# EAGLE board modemIO_v1 (EAGLE 6.2)

Size 79.05 x 69.2 mm. Coordinates in mm from the lower left corner, seen from the top.
Outline: 0,0 79.05,0 79.05,69.2 0,69.2 0,0
Copper layers (1*16): Top 0.035mm / dielectric 1.5mm / Bottom 0.035mm
Design rules: minimum track width 10mil, minimum drill 24mil, track to track 8mil, track to pad 8mil, pad to pad 8mil, via to via 8mil, smd to smd 8mil, copper to edge 40mil, drill to drill 8mil, minimum pad ring 10mil, minimum via ring 8mil, stop-mask expansion 4mil, vias tented up to drill 0mil, thermal gap 10mil
Holes 3.3 mm at 2.54,2.54 76.2,6.99 69.85,63.5 15.24,58.42

## Footprints (pad centres in the part's own frame; a part is rotated, then mirrored left to right if it is on the bottom)
C0805 = smd 1.3 x 1.5: 1 -0.85,0; 2 0.85,0
AVX-C = smd 1.524 x 2.54: + -2.794,0; - 2.794,0
DCJACK_2MM_PTH = drill 2.8: GND 0,7.35; GNDBREAK 4.8,10.75 | drill 3.2: PWR 0,13.6
1X10 = drill 1.016 long: 1 -11.43,0; 2 -8.89,0; 3 -6.35,0; 4 -3.81,0; 5 -1.27,0; 6 1.27,0; 7 3.81,0; 8 6.35,0; 9 8.89,0; 10 11.43,0
SMBJ = smd 1.78 x 2.16: A 2.04,0; C -2.03,0
R-PDSO-G30 = smd 0.3 x 1.2: 1 -3.5,-2.8; 2 -3,-2.8; 3 -2.5,-2.8; 4 -2,-2.8; 5 -1.5,-2.8; 6 -1,-2.8; 7 -0.5,-2.8; 8 0,-2.8; 9 0.5,-2.8; 10 1,-2.8; 11 1.5,-2.8; 12 2,-2.8; 13 2.5,-2.8; 14 3,-2.8; 15 3.5,-2.8; 16 3.5,2.8; 17 3,2.8; 18 2.5,2.8; 19 2,2.8; 20 1.5,2.8; 21 1,2.8; 22 0.5,2.8; 23 0,2.8; 24 -0.5,2.8; 25 -1,2.8; 26 -1.5,2.8; 27 -2,2.8; 28 -2.5,2.8; 29 -3,2.8; 30 -3.5,2.8
R-PDSO-G14 = smd 0.6 x 1.6: 1 -3.81,-2.7; 2 -2.54,-2.7; 3 -1.27,-2.7; 4 0,-2.7; 5 1.27,-2.7; 6 2.54,-2.7; 7 3.81,-2.7; 8 3.81,2.7; 9 2.54,2.7; 10 1.27,2.7; 11 0,2.7; 12 -1.27,2.7; 13 -2.54,2.7; 14 -3.81,2.7
SSOP28 = smd 0.4 x 1.5: 1 -4.225,-3.625; 2 -3.575,-3.625; 3 -2.925,-3.625; 4 -2.275,-3.625; 5 -1.625,-3.625; 6 -0.975,-3.625; 7 -0.325,-3.625; 8 0.325,-3.625; 9 0.975,-3.625; 10 1.625,-3.625; 11 2.275,-3.625; 12 2.925,-3.625; 13 3.575,-3.625; 14 4.225,-3.625; 15 4.225,3.625; 16 3.575,3.625; 17 2.925,3.625; 18 2.275,3.625; 19 1.625,3.625; 20 0.975,3.625; 21 0.325,3.625; 22 -0.325,3.625; 23 -0.975,3.625; 24 -1.625,3.625; 25 -2.275,3.625; 26 -2.925,3.625; 27 -3.575,3.625; 28 -4.225,3.625
SOT223 = smd 1.5 x 2: 1 -2.3,-3.15; 2 0,-3.15; 3 2.3,-3.15 | smd 3.8 x 2: 4 0,3.15
1X03 = drill 1.016 long: 1 -2.54,0; 2 0,0; 3 2.54,0
USB-MINIB = smd 2.5 x 0.5: D+ 2.5,0; D- 2.5,0.8; GND 2.5,-1.6; ID 2.5,-0.8; VBUS 2.5,1.6 | smd 2.5 x 2: MTN1 -3,4.5; MTN2 2.5,4.5; MTN3 -3,-4.5; MTN4 2.5,-4.5 | hole 0.9: 0,2.2; 0,-2.2
1X05 = drill 1.016 long: 1 -5.08,0; 2 -2.54,0; 3 0,0; 4 2.54,0; 5 5.08,0
FB603 = smd 1.3 x 1.5: 1 -0.85,0; 2 0.85,0
CHIP-LED0805 = smd 1.2 x 1.2: A 0,-1.05; C 0,1.05
SMD1,27-2,54 = smd 1.27 x 2.54: 1 0,0
ASF = smd 1.6 x 1.5: 1 -1.25,-1.15; 2 1.25,-1.15; 3 1.25,1.15; 4 -1.25,1.15
R0805 = smd 1.3 x 1.5: 1 -0.85,0; 2 0.85,0
B3F-10XX = drill 1.016 long: 1 -3.251,2.261; 2 3.251,2.261; 3 -3.251,-2.261; 4 3.251,-2.261
AUDIO-JACK-3.5MM-SMD = smd 2 x 2.5: RING 4.3,3.45; SLEEVE 2.5,-3.45; TIP 11.7,-3.45 | smd 1.2 x 2.5: RSH 1.5,3.45 | smd 2.5 x 2: TSH 15.75,0.75 | hole 2: 3.5,0; 10.5,0

## Placement (x,y rotation side)
C1  C0.1uF 10V  [C0805]  64.45,23.5 180 top
C2  C0.1uF 10V  [C0805]  64.45,25.72 180 top
C3  C1uF 10V  [C0805]  68.58,31.11 90 top
C4  C0.1uF 10V  [C0805]  66.67,35.24 90 top
C5  C1uF 10V  [C0805]  64.45,35.24 90 top
C6  C0.01uF 50V  [C0805]  62.23,35.24 90 top
C7  C0.1uF 10V  [C0805]  55.88,39.69 90 top
C8  C1uF 10V  [C0805]  58.1,39.69 90 top
C9  C0.01uF 50V  [C0805]  60.33,39.69 90 top
C10  C0.1uF 10V  [C0805]  54.93,26.99 270 top
C11  C0.1uF 10V  [C0805]  57.15,26.99 270 top
C12  C0.1uF 10V  [C0805]  59.37,26.99 270 top
C13  C0.1uF 10V  [C0805]  53.66,39.69 90 top
C14  C10uF 6.3V  [C0805]  49.21,14.29 90 top
C15  C0.1uF 10V  [C0805]  62.87,14.29 90 top
C16  C0.1uF 10V  [C0805]  31.11,33.97 90 top
C17  C0.1uF 10V  [C0805]  25.4,33.97 90 top
C18  C4.7uF 10V  [AVX-C]  28.26,33.66 90 top
C19  C1uF 10V  [C0805]  35.24,48.26 180 top
C20  C1uF 10V  [C0805]  29.53,53.66 270 top
C21  C1uF 10V  [C0805]  46.35,48.26 180 top
C22  C1uF 10V  [C0805]  40.64,53.66 270 top
C23  C1uF 10V  [C0805]  57.47,48.26 180 top
C24  C1uF 10V  [C0805]  51.75,53.66 270 top
CN1  [DCJACK_2MM_PTH]  82.23,50.8 90 top
CODEC_PORT  [1X10]  45.24,30.48 90 top
D1  SMBJ10CA  [SMBJ]  49.21,8.89 90 top
D2  SMBJ10CA  [SMBJ]  62.87,8.89 90 top
IC1  TLV320AIC14R-PDSO-G30  [R-PDSO-G30]  57.15,33.34 270 top
IC2  SN74LVC04ADRR-PDSO-G14  [R-PDSO-G14]  38.1,34.29 90 top
IC3  FT232RL  [SSOP28]  14.29,32.07 270 top
IC4  LD117AS33TR  [SOT223]  34.29,53.66 0 top
IC5  LD117AS18TR  [SOT223]  45.4,53.66 0 top
IC6  LD117AS33TR  [SOT223]  56.52,53.66 0 top
IO_PORT  [1X10]  13.49,64.77 0 top
JP1  [1X03]  17.46,14.61 180 top
JP2  USBSMD  [USB-MINIB]  37.78,6.03 90 top
JP3  [1X05]  56.83,64.77 0 top
L1  [FB603]  35.56,12.06 270 top
LED1  [CHIP-LED0805]  22.86,31.11 0 top
LED2  [CHIP-LED0805]  20.64,31.11 0 top
MICRO_PORT_1  [1X10]  13.49,19.05 0 top
PAD1  [SMD1,27-2,54]  75.56,23.81 0 top
PAD2  [SMD1,27-2,54]  75.56,27.94 0 top
Q1-18.432MHZ  ASFL1  [ASF]  64.45,31.11 180 top
R1  R1K  [R0805]  51.12,36.2 0 top
R2  R1K  [R0805]  51.12,33.97 0 top
R3  R1K  [R0805]  51.12,31.75 0 top
R4  R1K  [R0805]  64.45,27.94 0 top
R5  R1K  [R0805]  22.86,27.3 90 top
R6  R1K  [R0805]  20.64,27.3 90 top
S1  [B3F-10XX]  7.3,11.43 270 top
U1  [AUDIO-JACK-3.5MM-SMD]  55.24,0 90 top
U2  [AUDIO-JACK-3.5MM-SMD]  68.9,0 90 top

## Library data of the parts
C1-C17 C19-C24 R1-R6 = resistor
C18 = OPL Eagle Library
CN1 = adafruit
CODEC_PORT IO_PORT JP1 JP3 MICRO_PORT_1 = pinhead
D1 D2 = diode
IC1 = TLV320AIC14
IC2 = SN74LVC04ADR
IC3 = ftdichip; MPN: FT232RL; OC_FARNELL: 1146032; OC_NEWARK: 91K9918
IC4-IC6 = v-reg
JP2 U1 U2 = SparkFun-Connectors
L1 = dp_devices
LED1 LED2 = led
PAD1 PAD2 = wirepad
Q1-18.432MHZ = crystal; MF: Abracon Corporation; MPN: ASFL1-125.000MHZ-EC-T; OC_FARNELL: 1838931; OC_NEWARK: 19M1882
S1 = switch-omron; MPN: B3F-1000; OC_FARNELL: 176432; OC_NEWARK: 36M3542

## Nets
1V8: C4.1 C5.1 C6.1 C22.1 IC1.29 IC5.4 IO_PORT.8
3V3: C3.1 C7.1 C8.1 C9.1 C13.1 C20.1 IC1.2 IC2.14 IC4.4 IO_PORT.9 Q1-18.432MHZ.4 R1.1 R2.1 R3.1
3V3A: C10.1 C11.1 C12.1 C24.1 IC1.11 IC1.17 IC6.4
3V3OUT: C16.1 IC3.17 JP1.1
5V: C17.1 C18.+ IC3.20 JP1.3 L1.1 R5.1 R6.1
5V_USB: JP2.VBUS L1.2
AGND: C1.1 C2.1 C10.2 C11.2 C12.2 C23.2 C24.2 D1.A D2.A IC1.12 IC1.16 IC6.1 PAD2.1 U1.SLEEVE U2.SLEEVE
ANALOG_IN_1: IC1.18
ANALOG_IN_2: C15.2 IC1.19
ANALOG_OUTM1: IC1.9
ANALOG_OUTP1: C14.2 IC1.10
BIAS: IC1.21
CODEC_CLK: IC1.28 IC2.1
CODEC_CLKN: CODEC_PORT.1 IC2.2
CODEC_FS: IC1.4 IC2.3 IC2.5
CODEC_FS_MSPN: IC2.6
CODEC_FSN: CODEC_PORT.7 IC2.4
CODEC_RESETN: CODEC_PORT.4 IC1.24 R4.1
CODEC_RX_DATA: CODEC_PORT.2 IC1.5
CODEC_TX_DATA: CODEC_PORT.3 IC1.6
DC_IN: C19.1 C21.1 C23.1 CN1.PWR IC4.3 IC5.3 IC6.3
DSP_RESET: MICRO_PORT_1.1 S1.3 S1.4
GND: C3.2 C4.2 C5.2 C6.2 C7.2 C8.2 C9.2 C13.2 C16.2 C17.2 C18.- C19.2 C20.2 C21.2 C22.2 CN1.GND CN1.GNDBREAK IC1.1 IC1.30 IC2.7 IC3.7 IC3.18 IC3.21 IC3.25 IC3.26 IC4.1 IC5.1 IO_PORT.7 JP2.GND JP3.5 MICRO_PORT_1.2 MICRO_PORT_1.3 MICRO_PORT_1.4 MICRO_PORT_1.5 MICRO_PORT_1.6 MICRO_PORT_1.7 MICRO_PORT_1.8 MICRO_PORT_1.9 MICRO_PORT_1.10 PAD1.1 Q1-18.432MHZ.2 R4.2 S1.1 S1.2
HOST_CLK: CODEC_PORT.6 IC1.26
HOST_DATA: CODEC_PORT.5 IC1.27
INM1: IC1.22
N$1: C14.1 D1.C U1.RING
N$2: IC3.23 LED1.C
N$3: IC1.3 R1.2
N$4: IC3.22 LED2.C
N$5: C15.1 D2.C U2.RING
N$6: LED1.A R5.2
N$7: IC1.7 R2.2
N$8: IC1.8 R3.2
N$9: LED2.A R6.2
N$17: C1.2 IC1.20
N$20: C2.2 IC1.23
N$22: IC1.25 Q1-18.432MHZ.3
STAT2/UART0_RTS: IC3.3 IO_PORT.4 JP3.4
UART0_CHAN_RX: IC3.5 IO_PORT.1 JP3.1
UART0_CHAN_TX: IC3.1 IO_PORT.2 JP3.2
UART0_CTS: IC3.11 IO_PORT.3 JP3.3
UART1_RX: IO_PORT.6
UART1_TX: IO_PORT.5
USBDM: IC3.16 JP2.D-
USBDP: IC3.15 JP2.D+
VCCIO: IC3.4 JP1.2

## Tracks (layer width: path | path; a pad name or v marks a point on that pad's centre or on a via)
1V8  (6 unrouted)
3V3  (13 unrouted)
3V3A  (6 unrouted)
3V3OUT  (2 unrouted)
5V  (6 unrouted)
5V_USB  (1 unrouted)
AGND  (14 unrouted)
ANALOG_IN_2  (1 unrouted)
ANALOG_OUTP1  (1 unrouted)
CODEC_CLK  (1 unrouted)
CODEC_CLKN  (1 unrouted)
CODEC_FS  (2 unrouted)
CODEC_FSN  (1 unrouted)
CODEC_RESETN  (2 unrouted)
CODEC_RX_DATA  (1 unrouted)
CODEC_TX_DATA  (1 unrouted)
DC_IN  (6 unrouted)
DSP_RESET  (2 unrouted)
GND  (43 unrouted)
HOST_CLK  (1 unrouted)
HOST_DATA  (1 unrouted)
N$1  (2 unrouted)
N$2  (1 unrouted)
N$3  (1 unrouted)
N$4  (1 unrouted)
N$5  (2 unrouted)
N$6  (1 unrouted)
N$7  (1 unrouted)
N$8  (1 unrouted)
N$9  (1 unrouted)
N$17  (1 unrouted)
N$20  (1 unrouted)
N$22  (1 unrouted)
STAT2/UART0_RTS  (2 unrouted)
UART0_CHAN_RX  (2 unrouted)
UART0_CHAN_TX  (2 unrouted)
UART0_CTS  (2 unrouted)
USBDM  (1 unrouted)
USBDP  (1 unrouted)
VCCIO  (1 unrouted)